# Altium PCB Brduino.PcbDoc
Units mil, origin at the board's own origin, x right, y up, seen from the top; angles counter-clockwise.
Board outline 1720 x 760 mil, 4 copper layers (Top Layer, InternalPlane1, InternalPlane2, Bottom Layer), stack 55.906 mil thick; 48 components, 77 nets, 233 pads, 114 vias.
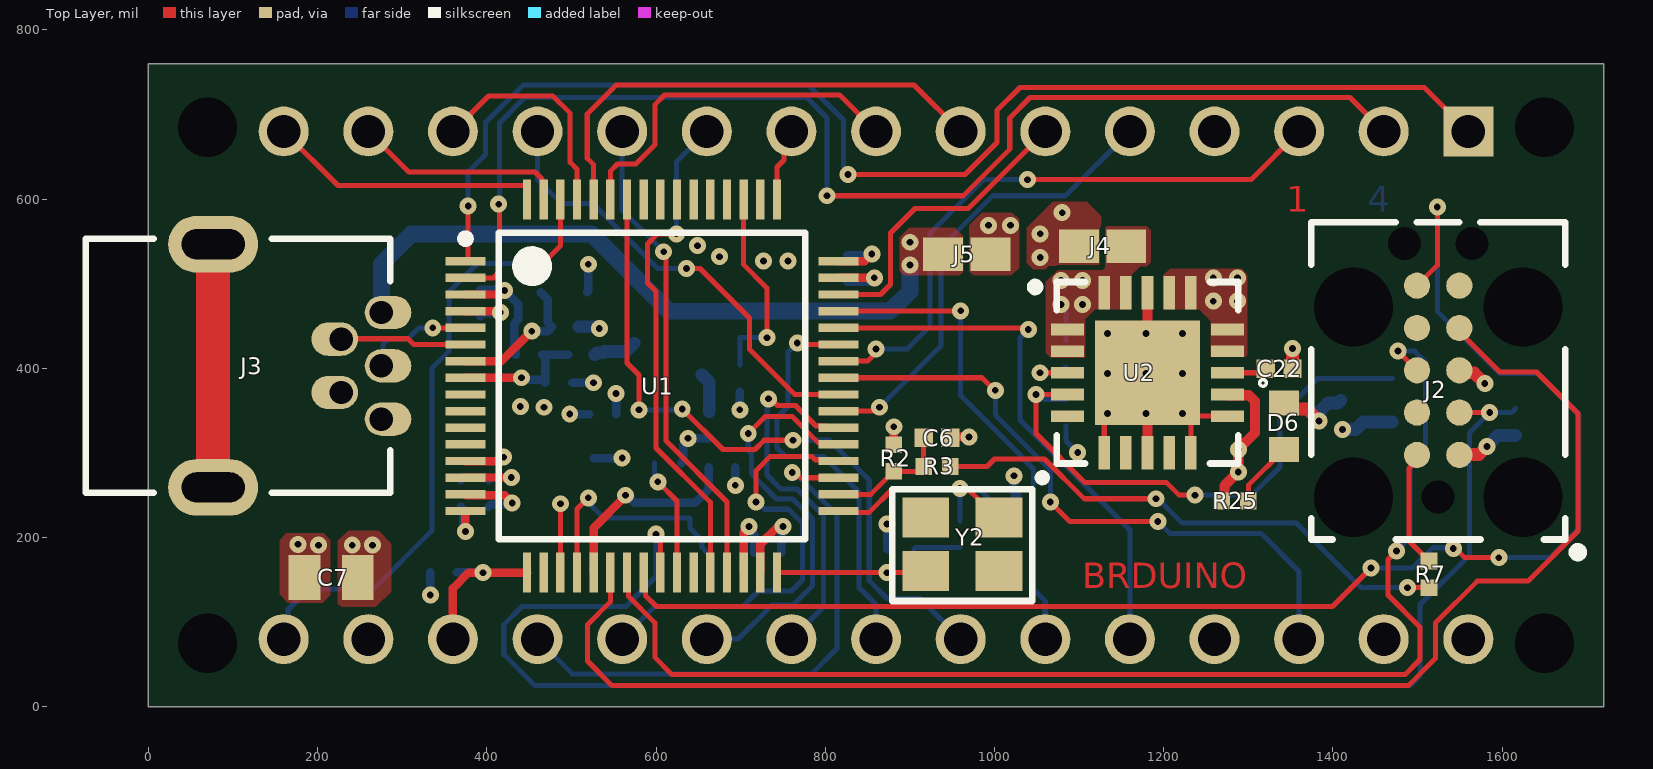
[diagram p0: Top Layer view]
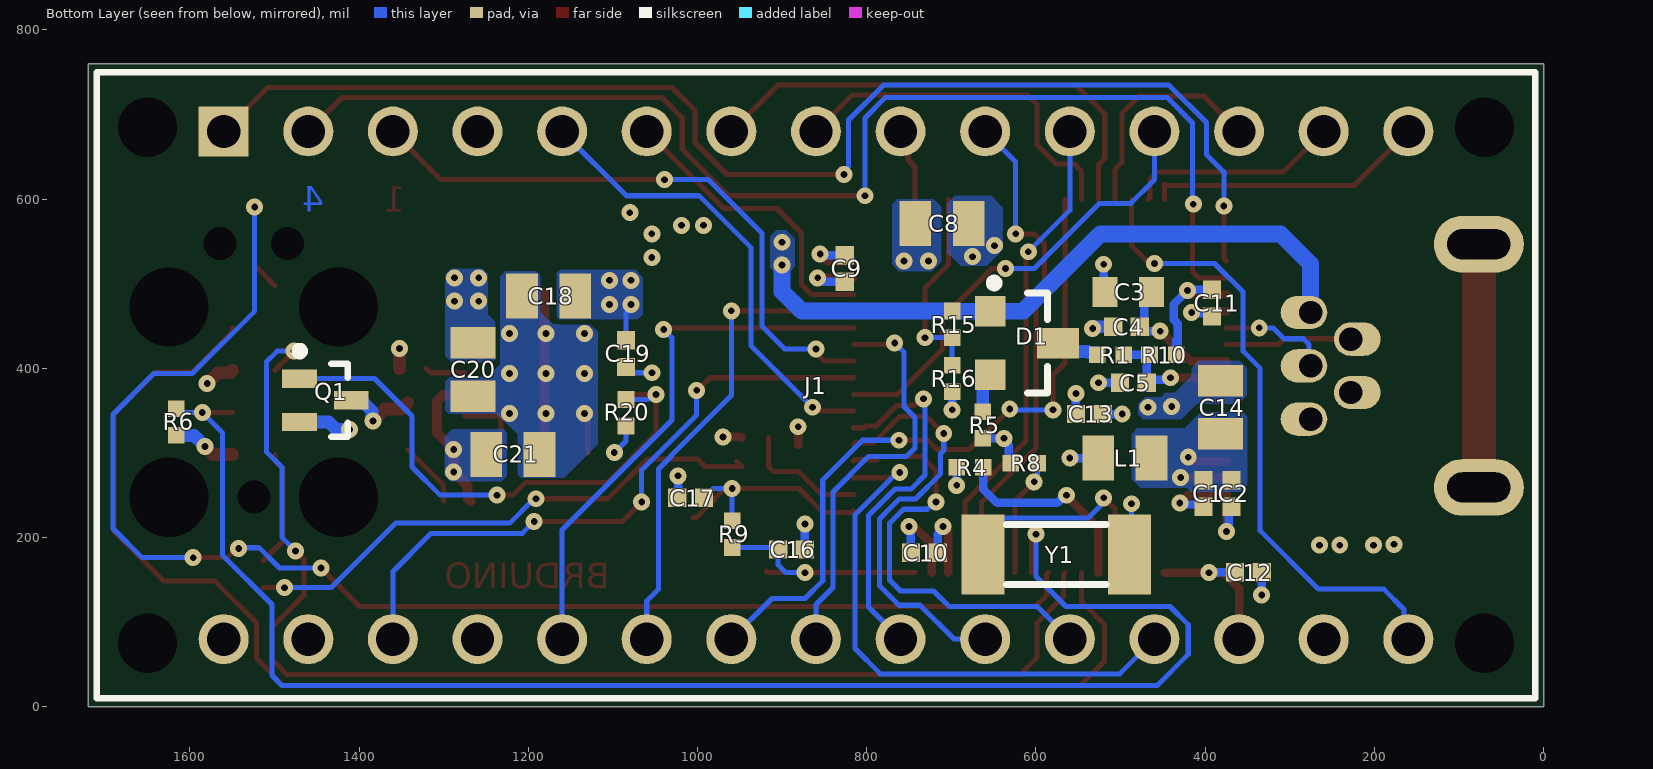
[diagram p1: Bottom Layer view, seen from below]
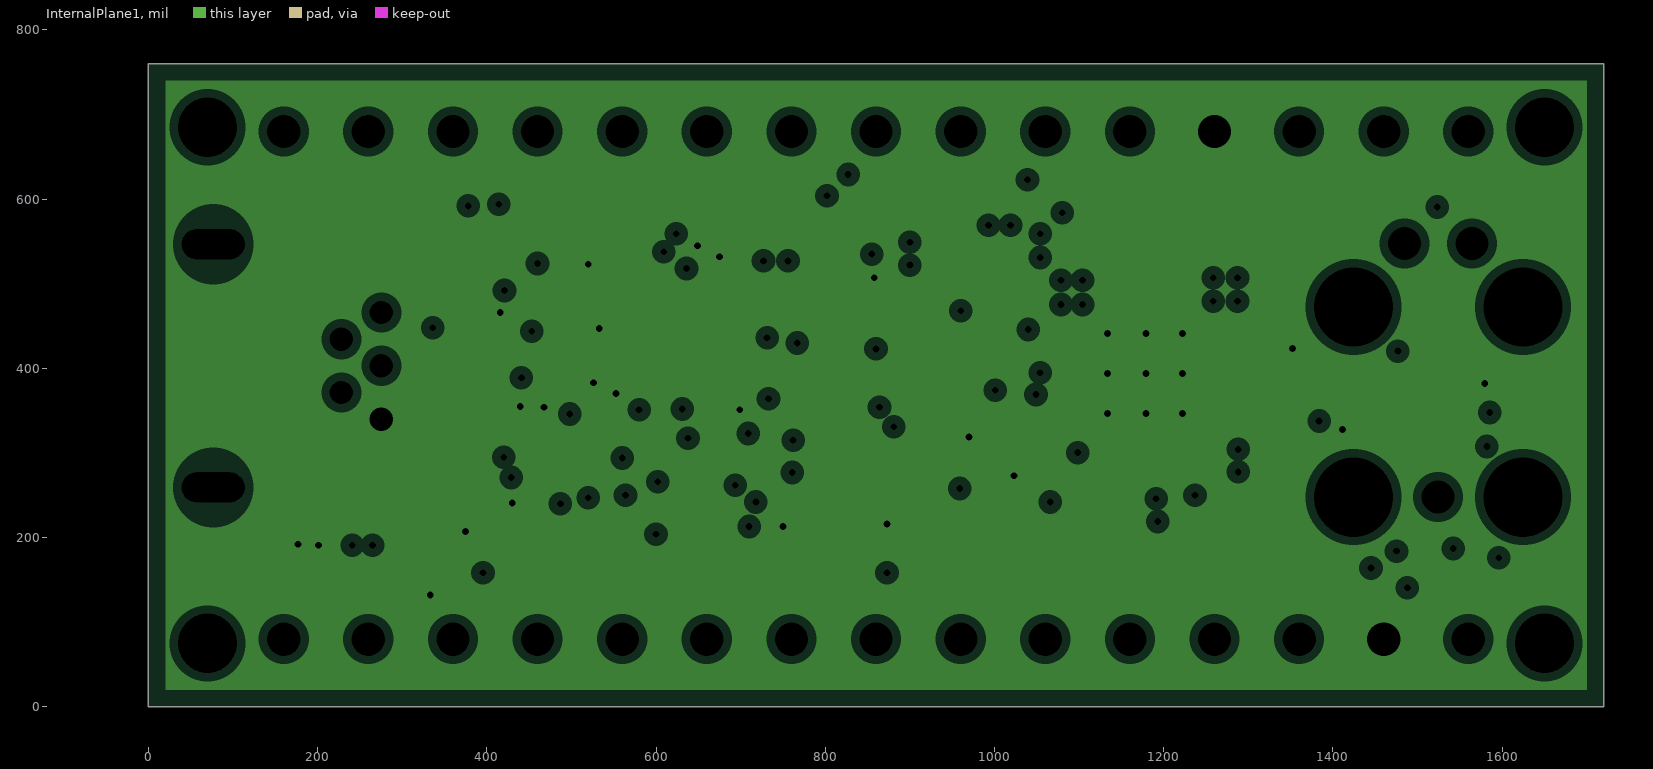
[diagram p2: InternalPlane1, clearances drawn from the general rule]
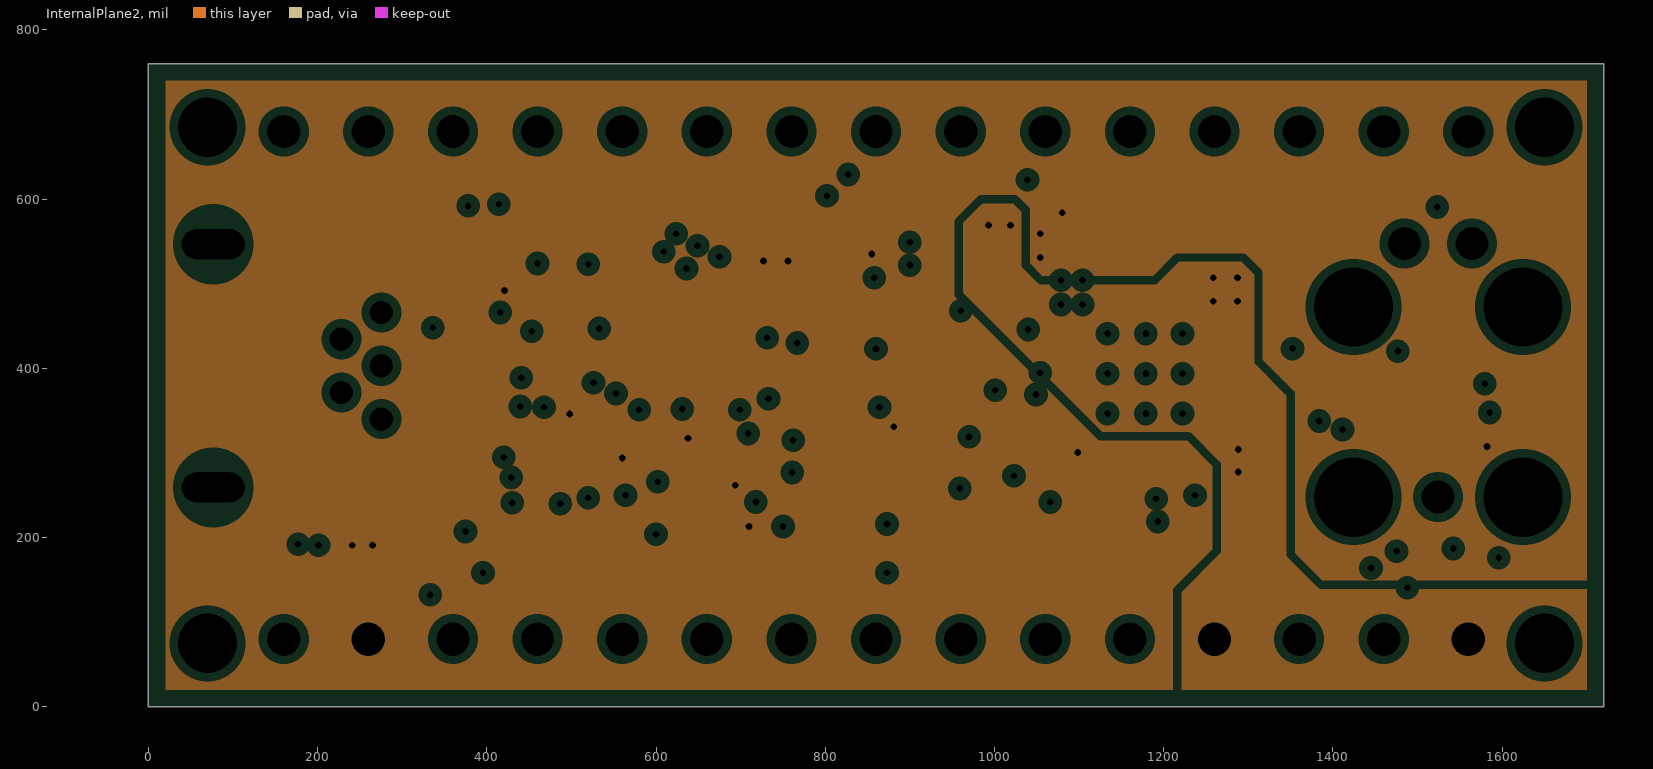
[diagram p3: InternalPlane2, clearances drawn from the general rule]

## Layer stack, top to bottom
Top Solder: solder mask 0.5, Solder Resist, Dk 3.5
Top Layer: signal copper 1.378
Dielectric1: prepreg 5.5118, FR-4, Dk 4.3
InternalPlane1: plane copper 1.378, net GND
Dielectric2: core 39.3701, FR-4, Dk 4.3
InternalPlane2: plane copper 1.378, net (Multiple Nets)
Dielectric3: prepreg 5.5118, FR-4, Dk 4.3
Bottom Layer: signal copper 1.378
Bottom Solder: solder mask 0.5, Solder Resist, Dk 3.5

## Board outline
0,0 1720,0 1720,760 0,760

## Design rules (kind name [scope] priority, off if disabled: settings)
AssemblyTestPointUsage [All] p1 off:
AssemblyTestpoint [All] p1 off: testpointundercomponent=TRUE minsize=40 maxsize=100 preferedsize=60 minholesize=0 maxholesize=40 preferedholesize=32 testpointgrid=1 usegrid=TRUE gridtolerance=0.01 allowsidetop=TRUE allowsidebottom=TRUE
Clearance Clearance-primary [InNetClass('HV-P')] p1: gap=27.56 ignorepadtopadclearanceinfootprint=FALSE
Clearance [All] p2: gap=6 ignorepadtopadclearanceinfootprint=FALSE
ComponentClearance [All] p1 off: gap=10 collisioncheckmode=3 verticalgap=10 showdistances=FALSE
DiffPairsRouting DiffPairsRouting_USB [InDifferentialPair('CPUSIGA.USB-D_1')] p1: maxlimit=10 minlimit=6 mostfreqgap=6 toplayer_minwidth=7.68 toplayer_maxwidth=15 toplayer_prefwidth=7.68 bottomlayer_minwidth=7.68 bottomlayer_maxwidth=15 bottomlayer_prefwidth=7.68 maxuncoupledlength=500
DiffPairsRouting [InDifferentialPairClass('HighSpeedDiff')] p2: maxlimit=10.08 minlimit=6.14 mostfreqgap=6.14 toplayer_minwidth=6 toplayer_maxwidth=15 toplayer_prefwidth=6 bottomlayer_minwidth=6 bottomlayer_maxwidth=15 bottomlayer_prefwidth=6 maxuncoupledlength=551.18
FabricationTestPointUsage TestPointUsage [All] p1 off: valid=0 allowmultiple=FALSE
FabricationTestpoint Testpoint [All] p1 off: side=3 testpointundercomponent=TRUE minsize=40 maxsize=100 preferedsize=60 minholesize=0 maxholesize=40 preferedholesize=32 testpointgrid=1 allowsidetop=TRUE allowsidebottom=TRUE usegrid=TRUE gridtolerance=0.01
Height [All] p1 off: minheight=0 maxheight=1000 prefheight=500
HoleSize [All] p1: absolutevalues=TRUE maxlimit=200 minlimit=7.87 maxpercent=80.000 minpercent=20.000
MatchedLengths MatchedLengthsDiff [InDifferentialPair('ETH-TX_8') or InDifferentialPair('ETH-RX_8') or InDifferentialPair('CPUSIGA.USB-D_1')] p1: tolerance=39.37 checknetsindiffpair=TRUE checkdiffpairvsdiffpair=FALSE checkxsignals=FALSE checkothers=FALSE
MatchedLengths [InxSignalClass('RMII-IF')] p2: tolerance=10 checknetsindiffpair=FALSE checkdiffpairvsdiffpair=TRUE checkxsignals=TRUE checkothers=TRUE
MinimumSolderMaskSliver [All] p1 off: minsoldermaskwidth=3.15
NetAntennae [All] p1 off: netantennaetolerance=0
PlaneClearance [All] p1: clearance=10
PlaneConnect [All] p1: planeconnectstyle=Direct reliefexpansion=20 reliefentries=4 reliefconductorwidth=10 reliefairgap=10
PolygonConnect [All] p1: connectstyle=Direct reliefconductorwidth=10 reliefentries=4 polygonreliefangle="90 Angle" airgapwidth=10
RoomDefinition U_Brduino-MCU-Main [InComponentClass('U_Brduino-MCU-Main')] p1 off: confinementstyle=ConfineIn formatcopy=TRUE lockcomponents=FALSE outline -88.62,110.61 1076.38,110.61 1076.38,605.61 -88.62,605.61
RoomDefinition U_Brduino-MCU1 [InComponentClass('U_Brduino-MCU1')] p2: confinementstyle=ConfineIn formatcopy=TRUE lockcomponents=FALSE outline 148.38,108.61 1742.38,108.61 1742.38,646.61 148.38,646.61
RoomDefinition Brduino-Main [InComponentClass('Brduino-Main')] p3: confinementstyle=ConfineIn formatcopy=TRUE lockcomponents=FALSE outline -10.98,-10.98 -10.98,770.98 1730.98,770.98 1730.98,-10.98
RoomDefinition U_Brduino-PwrLin [InComponentClass('U_Brduino-PwrLin')] p4 off: confinementstyle=ConfineIn formatcopy=TRUE lockcomponents=FALSE outline 1027.38,214.61 1507.38,214.61 1507.38,580.61 1027.38,580.61
RoutingVias [All] p1: holewidth=8 width=20 viastyle="Through Hole" minholewidth=8 minwidth=20 maxholewidth=20 maxwidth=40
SilkToSilkClearance [All] p1 off: silktosilkclearance=10
SilkToSolderMaskClearance SilkscreenOverComponentPads [IsPad] p1 off: minsilkscreentomaskgap=10 clearancetoexposedcopper=TRUE
SolderMaskExpansion [All] p1: expansion=2 istentingtop=FALSE
Width Width_HighSpeedDiff [InDifferentialPairClass('HighSpeedDiff')] p1: maxlimit=6 minlimit=6 preferedwidth=6 minimp=50.000000 maximp=50.000000 favimp=50.000000
Width Width_Fiducial [IsArc and InComponent('FID*')] p2: maxlimit=10 minlimit=3.5 preferedwidth=10
Width [All] p3: maxlimit=200 minlimit=6 preferedwidth=6
16 further rules are at their usual default settings.

## Classes and differential pairs
component class U_Brduino-PwrLin: C18 C19 C20 C21 C22 D6 J4 Q1 R20 R25 U2
component class U_Brduino-MCU-Main: C16 C17 J3 R9 R15 R16 Y2
component class U_Brduino-MCU1: C1 C2 C3 C4 C5 C6 C7 C8 C9 C10 C11 C12 C13 C14 D1 J2 L1 R1 R2 R3 R4 R5 R6 R7 R8 R10 U1 Y1
component class Brduino-Main: J1 J5
differential pair USB-D_2: +USB-D_2_P -USB-D_2_N

## Components (designator, comment, footprint, x,y, rotation, side; value= is the part's Value field where it differs from the comment)
C1 "100n" C0402 402,252 r270 bottom
C2 "100n" C0402 369,252 r270 bottom
C3 "2u2" C0603 491,490 r0 bottom
C4 "100n" C0402 493,449 r0 bottom
C5 "100n" C0402 485,383 r0 bottom
C6 "100n" C0402 932,318 r0 top
C7 "10u" C0805 216,153 r180 top
C8 "10u" C0805 711,571 r180 bottom
C9 "100n" C0402 826,518 r270 bottom
C10 "100n" C0402 732,182 r0 bottom
C11 "100n" C0402 392,477 r270 bottom
C12 "100n" C0402 349,159 r180 bottom
C13 "100n" C0402 537,346 r180 bottom
C14 "4u7" C0805 382,354 r270 bottom
C16 "22p" C0402 889,186 r180 bottom
C17 "22p" C0402 1008,247 r0 bottom
C18 "22u" C0805 1175.94,485.32 r180 bottom
C19 "10n" C0402 1084.41,417.4 r270 bottom
C20 "10u" C0805 1265.51,398.7 r90 bottom
C21 "10u" C0805 1218.27,298.31 r0 bottom
C22 "10n" C0402 1336.38,399.68 r0 top
D1 "BAT54C" SOT23 614,430 r270 bottom
D6 "LED green" LED0603 1342.28,331.77 r90 top
J1 "ARDUINO-NANO-CON" ARDUINO-NANO 860,380 r180 bottom locked
J2 "JLINK-NEEDLE" JLINK-NEEDLE 1524.37,397.72 r90 top locked
J3 "MICRO-USB" Molex-0565790519 176,403 r0 top locked
J4 "Jumper" JumperSMD 1127.72,544.37 r180 top
J5 "Jumper" JumperSMD 967,535 r180 top
L1 "600R@100MHz" L0805 495,294 r180 bottom
Q1 "PMF250XNEX" SOT323 1439.72,362.28 r180 bottom
R1 "0R" R0402 512,416 r180 bottom
R2 "4K7" R0402 881,294 r90 top
R3 "22R" R0402 932,284 r0 top
R4 "100R" R0402 678,283 r0 bottom
R5 "0R" R0402 663,333 r90 bottom
R6 "10K" R0402 1615.91,336.69 r270 bottom
R7 "33R" R0402 1513.54,156.57 r270 top
R8 "10K" R0402 614,288 r0 bottom
R9 "1M" R0402 959,204 r270 bottom
R10 "0R" R0402 450,416 r0 bottom
R15 "4K7" R0402 699,452 r90 bottom
R16 "10K" R0402 699,388 r90 bottom
R20 "4K7" R0402 1084.41,347.52 r270 bottom
R25 "3K9" R0402 1284.21,243.19 r0 top
U1 "MK22FN512VLH12" NXP-SOT1699-1 595.24,379.02 r0 top locked
U2 "TPS7A8300" S-PVQFN-N20 1180.87,394.76 r0 top
Y1 "32.768KHz" FC 576,180 r180 bottom
Y2 "24.0000MHz" "EPSON-XTAL6 3.2mm x 5mm 4pin" 962,192 r180 top locked

## Footprints (in the part's own frame and the unit in brackets; to place one, negate y for a bottom-side part, rotate by r counter-clockwise, add the part's x,y. Pads: shape width x height; smd on the part's side, far side on the other; paste and mask are expansions set on the pad)
ARDUINO-NANO [mm]
  rect 1.5x1.5 hole 1: 1(-17.78,7.62)
  round 1.5 hole 1: 2(-15.24,7.62) 3(-12.7,7.62) 4(-10.16,7.62) 5(-7.62,7.62) 6(-5.08,7.62) 7(-2.54,7.62) 8(0,7.62) 9(2.54,7.62) 10(5.08,7.62) 11(7.62,7.62) 12(10.16,7.62) 13(12.7,7.62) 14(15.24,7.62) 15(17.78,7.62) 16(17.78,-7.62) 17(15.24,-7.62) 18(12.7,-7.62) 19(10.16,-7.62) 20(7.62,-7.62) 21(5.08,-7.62) 22(2.54,-7.62) 23(0,-7.62) 24(-2.54,-7.62) 25(-5.08,-7.62) 26(-7.62,-7.62) 27(-10.16,-7.62) 28(-12.7,-7.62) 29(-15.24,-7.62) 30(-17.78,-7.62)
  round 0 hole 1.778 unplated: M1(-20.066,-7.747) M2(-20.066,7.747) M3(20.066,7.747) M4(20.066,-7.747)
  silkscreen extent -21.59,-9.4 21.59,9.4
C0402 [mm] "Chip Capacitor; Body 1.0x0.5mm (LxW typ), IPC High Density"
  rect 0.55x0.55 smd: 1(-0.4,0) 2(0.4,0)
  body extent -0.55,-0.3 0.55,0.3, height 0.6
C0603 [mm] "Chip Capacitor; Body 1.6x0.8mm (LxW typ), IPC High Density"
  rect 0.75x0.9 smd: 1(-0.7,0) 2(0.7,0)
  body extent -0.87,-0.48 0.87,0.48, height 0.85
C0805 [mm] "Chip Capacitor; Body 2.0x1.3mm (LxW typ), IPC High Density"
  rect 0.95x1.35 smd: 1(-0.8,0) 2(0.8,0)
  body extent -1.1,-0.73 1.1,0.72, height 1.1
"EPSON-XTAL6 3.2mm x 5mm 4pin" [mm]
  rect 1.4x1.2 smd: 1(-1.1,-0.8) 2(1.1,-0.8) 3(1.1,0.8) 4(-1.1,0.8)
  silkscreen extent -2.5,-2.1 2.1,1.7, body extent -1.65,-1.3 1.65,1.25, height 0.7
FC [mm]
  rect 1.3x2.4 smd: 1(-2.2,0) 2(2.2,0)
  silkscreen extent -1.5,-0.9 1.5,0.9, body extent -2.5,-0.95 2.5,0.95, height 0.9
JLINK-NEEDLE [mil]
  round 31 smd paste-31: 1(-100,-25) 2(-50,-25) 3(0,-25) 4(50,-25) 5(100,-25) 6(100,25) 7(50,25) 8(0,25) 9(-50,25) 10(-100,25)
  round 0 hole 93.5 unplated: M1(-150,100) M2(-150,-100) M3(75,100) M4(75,-100)
  round 0 hole 39 unplated: P1(-150,0) P2(150,40) P3(150,-40)
  silkscreen extent -220,-170 175,150
JumperSMD [mm] "Chip Resistor, Body 1.6x0.8mm (LxW typ), IPC High Density"
  rect 1.2x1 smd: 1(-0.711,0) 2(0.711,0)
L0805 [mm]
  rect 0.95x1.35 smd: 1(-0.8,0) 2(0.8,0)
  body extent -1.1,-0.72 1.1,0.72, height 1.1
LED0603 [mm]
  rect 0.75x0.9 smd: 1(-0.7,0) 2(0.7,0)
  silkscreen extent 1.2,0.54 1.4,0.73, body extent -0.87,-0.48 0.88,0.48, height 0.85
Molex-0565790519 [mm]
  oval 1.4x1 hole 0.7 copper offset 0.2,0: 1(2.525,1.6) 3(2.525,0) 5(2.525,-1.6)
  oval 1.4x1 hole 0.7 copper offset -0.2,0: 2(1.325,0.8) 4(1.325,-0.8)
  oval 2.7x1.7 hole 0.9 slot 1.9 at 0 deg: M1(-2.525,-3.65) M2(-2.525,3.65)
  silkscreen extent -6.35,-3.81 2.79,3.81, body extent -6.27,-3.85 2.73,3.85, height 3.95
NXP-SOT1699-1 [mm] "TSQFP, 64-Leads, Body 10.00x10.00mm, Pitch 0.50mm, IPC High Density"
  rect 1.2x0.25 smd: 1(-5.6,3.75) 2(-5.6,3.25) 3(-5.6,2.75) 4(-5.6,2.25) 5(-5.6,1.75) 6(-5.6,1.25) 7(-5.6,0.75) 8(-5.6,0.25) 9(-5.6,-0.25) 10(-5.6,-0.75) 11(-5.6,-1.25) 12(-5.6,-1.75) 13(-5.6,-2.25) 14(-5.6,-2.75) 15(-5.6,-3.25) 16(-5.6,-3.75) 33(5.6,-3.75) 34(5.6,-3.25) 35(5.6,-2.75) 36(5.6,-2.25) 37(5.6,-1.75) 38(5.6,-1.25) 39(5.6,-0.75) 40(5.6,-0.25) 41(5.6,0.25) 42(5.6,0.75) 43(5.6,1.25) 44(5.6,1.75) 45(5.6,2.25) 46(5.6,2.75) 47(5.6,3.25) 48(5.6,3.75)
  rect 0.25x1.2 smd: 17(-3.75,-5.6) 18(-3.25,-5.6) 19(-2.75,-5.6) 20(-2.25,-5.6) 21(-1.75,-5.6) 22(-1.25,-5.6) 23(-0.75,-5.6) 24(-0.25,-5.6) 25(0.25,-5.6) 26(0.75,-5.6) 27(1.25,-5.6) 28(1.75,-5.6) 29(2.25,-5.6) 30(2.75,-5.6) 31(3.25,-5.6) 32(3.75,-5.6) 49(3.75,5.6) 50(3.25,5.6) 51(2.75,5.6) 52(2.25,5.6) 53(1.75,5.6) 54(1.25,5.6) 55(0.75,5.6) 56(0.25,5.6) 57(-0.25,5.6) 58(-0.75,5.6) 59(-1.25,5.6) 60(-1.75,5.6) 61(-2.25,5.6) 62(-2.75,5.6) 63(-3.25,5.6) 64(-3.75,5.6)
  silkscreen extent -5.72,-4.6 4.6,4.6, body extent -5,-5 5,5, height 1.6
R0402 [mm] "Chip Resistor, Body 1.1x0.5mm (LxW typ), IPC High Density"
  rect 0.5x0.5 smd: 1(-0.4,0) 2(0.4,0)
  body extent -0.55,-0.3 0.55,0.3, height 0.4
S-PVQFN-N20 [mm] "(RGW) QFN 5mmx5mm, RM 0.65mm"
  rect 1x0.35 smd: 1(-2.4,1.3) 2(-2.4,0.65) 3(-2.4,0) 4(-2.4,-0.65) 5(-2.4,-1.3) 11(2.4,-1.3) 12(2.4,-0.65) 13(2.4,0) 14(2.4,0.65) 15(2.4,1.3)
  rect 0.35x1 smd: 6(-1.3,-2.4) 7(-0.65,-2.4) 8(0,-2.4) 9(0.65,-2.4) 10(1.3,-2.4) 16(1.3,2.4) 17(0.65,2.4) 18(0,2.4) 19(-0.65,2.4) 20(-1.3,2.4)
  rect 3.15x3.15 smd: 21(0,0)
  silkscreen extent -3.5,-2.73 2.73,2.73, body extent -2.58,-2.57 2.57,2.58, height 1
SOT23 [mil]
  rect 36x36 smd: 1(-37.5,-40) 2(37.5,-40)
  rect 36x50 smd: 3(0.5,40)
  silkscreen extent -76,-40 59,28, body extent -59,-28 59,28, height 43
SOT323 [mm]
  rect 1.05x0.55 smd: 1(-0.775,0.65) 2(-0.775,-0.65) 3(0.775,0)
  silkscreen extent -0.9,-1.1 0.67,1.6, body extent -0.67,-1.1 0.67,1.1, height 1.1

## Part data
C1 C2 C3 C4 C5 C6 C7 C8 C9 C10 C11 C12 C13 C14 C16 C17: library part CAP, POPULATED=yes
  C1 C2 C4 C5 C6 C9 C10 C11 C12 C13: Parameters="X7R, 25V, 10%"
  C3: Parameters="X5R, 10V, 10%"
  C7 C8 C14: Parameters="X7R, 10V, 10%"
  C16 C17: Parameters="C0G, 16V, 5%"
C18: library part CAP, MFR=MURATA, MFR-PN=GRM21BR61A226ME44#, Parameters="X5R, 10V, 10%", POPULATED=yes
C19 C22: library part CAP, MFR=MURATA, MFR-PN=GRM155R71H103KA88#, Parameters="X7R, 50V, 10%", POPULATED=yes
C20 C21: library part CAP, MFR=MURATA, MFR-PN=GRM21BR61E106KA73#, Parameters="X5R, 25V, 10%", POPULATED=yes
D1: library part DUALSDIODE-CC, MFR=ONSEMI, MFR-PN=BAT54C, POPULATED=yes
D6: library part LED, MFR=KINGBRIGHT, MFR-PN=APHD1608LCGCK, Parameters="If >= 2mA", POPULATED=yes
J3: MFR=GCT, MFR-PN=USB3080, POPULATED=yes
L1: library part FERRITE, "Ferrite Bead", MFR=WUERTH, MFR-PN=742792040, Parameters="Idc=2A, Rdc=0.15R", POPULATED=yes
Q1: library part MOSFET-N-D, "N-Channel MOSFET", MFR=NEXPERIA, MFR-PN=PMF250XNEX, POPULATED=yes
R1 R2 R3 R4 R5 R6 R7 R8 R9 R10 R15 R16 R20 R25: library part RES1A, Parameters="1/16W, 50V, 1%", POPULATED=yes
U1: MFR-PN=NXP, MFR=MK22FN512VLH12, POPULATED=yes
U2: MFR=TI, MFR-PN=TPS7A8300RGWT, POPULATED=yes
Y1: library part CRYSTAL2, MFR=EUROQUARTZ, MFR-PN=PH32768S, POPULATED=yes
Y2: library part CRYSTAL-5X3.2, MFR=EPSON, MFR-PN="FA-238 24.0000MB-C", Parameters="-20°C/+70°C, 50ppm, 18pF, 60ohms", POPULATED=yes
J1 J2 J4 J5: POPULATED=yes

## Via types
v1: diameter 20, hole 8, Top Layer to Bottom Layer, 114 vias

## Nets (pads, with @x,y where several pads share a name; then routed paths per layer and width w, separated by ;. In a path a pad name is that pad's centre, name@x,y a point inside that pad or via, vN(x,y) a via of type N, cw(c..) or ccw(c..) an arc to the next point about the centre after c; other vN are vias at no path point)
3V3: C7.1 C8.1 C9.1 C10.1 C11.1 C13.2 J1.17 J2.1 J4.2 L1.1 R2.2 R4.2 R5.1 R6.2 R8.2 R10.1 R20.2 U1.3 U1.30 U1.48 | length 618.1
  Top Layer w6: v1(1098.34,300.42) 1098.34,300.13 v1@1099.17,299.29
  Top Layer w10: U1.3 416.28,487.28 v1(421,492) ; U1.30 703.5,206.5 v1(710,213) ; U1.48 846.65,526.65 v1(855,535) ; R2.2 v1(881,331)
  Top Layer w15: J2.1 1549.92,298.27 1572.56,298.27 v1(1581.93,307.64)
  Bottom Layer w6: R20.2 1084.41,314.06 1098.04,300.42 v1(1098.34,300.42)
  Bottom Layer w10: C11.1 420.25,492.75 v1(421,492) 437,476 437,457.45 434.78,455.22 434.85,455.15 432.17,452.47 432.17,435.21 ; v1(498,346) C13.2 ; L1.1 v1(560,294) ; R8.2 632.25,290.5 632.25,309.05 637.75,314.55 v1(637.75,317.25) R5.1 ; v1(693.75,261.75) R4.2 ; v1(710,213) 710,210.29 716.25,204.04 C10.1 ; C9.1 853.75,533.75 v1(855,535) ; 432.17,435.21 432.17,418.09 R10.1 434.25,433.13 432.17,435.21
  Bottom Layer w15: v1(1581.93,307.64) 1594.82,320.53 1615.49,320.53 R6.2
  other v1: 241,191 265,191 727,527 756,527 1054,531 1054,559 1080,584
5V: C20.2 C21.2 J1.27 J1.30 J5.1 R25.1 U2.12 U2.14 U2.15 U2.16 U2.17 | length 170.1
  Top Layer w12: R25.1 1271.65,246.38 1271.65,261.14 v1(1288.15,277.64) v1(1288.15,304.21) 1307.83,323.9 1307.83,361.25 1300.81,368.28 1276.24,368.28 U2.12
  other v1: 1258.62,479.41 1287.17,479.41 1258.62,506.97 1287.17,506.97 993,569 1019,569
ADC0_DM0_1: U1.10
ADC0_DP0_1: U1.9
ADC1_DM0_1: U1.12
ADC1_DP0_1: U1.11
CHASSIS: J3.M1 J3.M2 | length 287.4
  Top Layer w40: J3.M1 J3.M2
DAC0_1: U1.18
EXTAL0_2: C16.1 R9.2 U1.32 Y2.3 | length 285.6
  Top Layer w6: U1.32 v1(873,158.54) 916.73,158.54 Y2.3
  Bottom Layer w6: v1(873,158.54) 895.54,158.54 904.75,167.75 C16.1 907,188.25 R9.2
GND: C1.2 C2.2 C3.2 C4.2 C5.2 C6.2 C7.2 C8.2 C9.2 C10.2 C11.2 C12.2 C13.1 C14.1 C16.2 C17.2 C18.1 C20.1 C21.1 C22.2 J1.4 J1.29 J2.3 J3.5 Q1.2 R16.1 U1.4 U1.15 U1.16 U1.31 U1.47 U2.6 U2.8 U2.10 U2.11 U2.18 U2.21 | length 1071.6
  Top Layer w6: U2.6 U2.21@1129.68,343.58 ; U2.10 1232.05,343.58 U2.11
  Top Layer w10: v1(374.76,207.24) U1.16 ; U1.15 375.83,250 421,250 v1(430,241) ; U1.4 416.21,467.6 416,467.39 v1(416,466) ; U1.31 723.19,192.19 744,213 v1(750,213) ; U1.47 v1(857.97,506.97) ; C6.2 948.75,319 v1(970,319)
  Top Layer w12: U2.8 U2.21 U2.18
  Top Layer w15: C22.2 v1(1352.13,423.31) ; J2.3 1552.43,394.66 1566.8,394.66 v1(1579.49,381.97)
  Bottom Layer w10: v1(333.25,132.25) C12.2 ; C2.2 372.34,232.91 372.34,212.36 374.76,209.94 v1(374.76,207.24) ; C11.2 395.83,465.08 416,465.08 v1(416,466) ; C1.2 404.83,239.09 428.09,239.09 v1(430,241) ; C5.2 v1(526,383) ; C3.2 520,491.44 v1(520,523) ; C13.1 v1(552.75,370.25) ; v1(699,351) R16.1 ; C10.2 747.75,208.04 750,210.29 v1(750,213) ; C9.2 850.55,502.25 855.26,506.97 v1(857.97,506.97) ; v1(873,216) 873,212 873.25,211.75 C16.2 ; v1(1023,273) 1023,254.25 1027,250.25 C17.2
  Bottom Layer w15: C4.2 531,449 v1(533,447) ; v1(1411.18,327.83) 1426.93,327.83 1435.79,336.69 Q1.2
  other v1: 201,191 177,192 1133.62,346.54 1178.9,346.54 1222.2,346.54 467.65,354 439.65,355 1133.62,393.78 1178.9,393.78 1222.2,393.78 1133.62,441.02 1178.9,441.02 1222.2,441.02 675,532 649,545
NetC3_1: C3.1 C4.1 U1.7 | length 166
  Top Layer w10: U1.7 417.32,408.54 452.69,443.91 v1(453.17,443.91)
  Bottom Layer w10: v1(453.17,443.91) 472.17,443.91 C4.1 472,454.25 472,481.44 C3.1
NetC6_1: C6.1 R2.1 R3.1 U1.34 | length 148.2
  Top Layer w6: U1.34 853.81,251.06 R2.1 910.5,278.25 R3.1 C6.1
NetC19_2: C19.2 U2.3 | length 65.8
  Top Layer w6: v1(1053.9,394.76) U2.3
  Bottom Layer w6: v1(1053.9,394.76) 1077.52,394.76 C19.2
NetC22_1: C22.1 U2.13 | length 47.3
  Top Layer w6: U2.13 1315.71,394.76 C22.1
NetD1_2: D1.2 R5.2 | length 47.5
  Bottom Layer w15: D1.2 663,383.5 R5.2
NetD1_3: D1.3 R1.1 | length 51.8
  Bottom Layer w15: R1.1 530.09,418.34 537.42,418.34 538.88,419.8 564.3,419.8 D1.3
NetD6_1: D6.1 R25.2 | length 78.6
  Top Layer w6: R25.2 1299.96,261.89 D6.1
NetD6_2: D6.2 Q1.3 | length 92.4
  Top Layer w15: D6.2 1349.55,352.07 1369.23,352.07 v1(1383.62,337.68)
  Bottom Layer w15: v1(1383.62,337.68) 1384.58,338.63 1384.58,349.46 1394.07,358.96 1405.89,358.96 Q1.3
NetJ2_5: J2.5
NetJ2_7: J2.7
NetJ2_9: J2.9
NetJ2_10: J2.10 R7.1 | length 139.1
  Top Layer w6: J2.10 1499.37,291.15 1489.92,281.7 1489.92,195.94 R7.1
NetJ3_4: J3.4
NetU1_19: U1.19 Y1.2 | length 143
  Top Layer w6: U1.19 v1(486.97,239.97)
  Bottom Layer w6: Y1.2@486.97,178.42 v1(486.97,239.97)
NetU1_20: U1.20 Y1.1 | length 283.7
  Top Layer w6: U1.20 506.65,233.65 v1(520,247)
  Bottom Layer w6: v1(520,247) 520,243.21 524.5,238.71 524.5,236.63 538.13,223 640.02,223 640.02,211.08 654,197.1 654,188.61 Y1.1 Y1.1@662.61,176
NetU2_5: U2.5
NetU2_7: U2.7
NetU2_9: U2.9
nRESET_1: R3.2 R7.2 | length 641
  Top Layer w6: R3.2@953.75,290 R3.2 991,284 1000,293 1059,293 1106.16,245.84 v1(1191,245.84) ; v1(1487.96,140.82) R7.2
  Bottom Layer w6: v1(1191,245.84) 1193.16,245.84 1222,217 1357,217 1433.18,140.82 v1(1487.96,140.82)
PGOOD1_1: Q1.1 R20.1 U2.4 | length 653.1
  Top Layer w6: U2.4 1049.17,369.17 v1(1049,369) 1049,322.89 1107.05,264.84 1203.5,264.84 1218.27,250.08 v1(1236.97,250.08)
  Bottom Layer w6: 1058.52,363.27 R20.1 ; v1(1236.97,250.08) 1303.9,250.08 1337.36,283.54 1337.36,343.58 1381.65,387.87 Q1.1
PTA0_3: J2.4 U1.22 | length 1722.2
  Top Layer w6: U1.22 546.02,124.02 519,97 519,54 548,25 1489,25 1521,57 1521,99 1570.5,148.5 1630.47,148.5 1689.72,207.76 1689.72,346.54 1640.51,395.75 1597.2,395.75 1549.37,443.58 J2.4
PTA1_3: J2.8 U1.23 | length 1490.1
  Top Layer w6: U1.23 567.63,156.62 567.63,130.37 598.53,99.47 598.53,58.47 619,38 1485.03,38 1503,55.97 1503,94 1465,132 1465,174 v1(1475,184) ; v1(1476.73,420.35) J2.8
  Bottom Layer w6: v1(1475,184) 1490.91,199.91 1490.91,282.69 1509.61,301.39 1509.61,407.56 1496.81,420.35 v1(1476.73,420.35)
PTA2_3: J2.6 U1.24 | length 1763
  Top Layer w6: U1.24 587.31,156.62 587.31,131.68 600.47,118.53 1399.53,118.53 v1(1445,164) ; J2.6 1523.39,521.73 v1(1523.39,590.63) ; v1(1542.24,187.11) 1544.89,187.11 1555.74,176.26 v1(1596,176.26)
  Bottom Layer w6: v1(1445,164) 1494,164 1518,188 1541.35,188 v1(1542.24,187.11) ; v1(1523.39,590.63) 1523.39,467.6 1597.2,393.78 1642.48,393.78 1690.71,345.55 1690.71,210.71 1656.26,176.26 v1(1596,176.26)
PTA3_3: J2.2 R6.1 U1.25 | length 1852.7
  Top Layer w6: v1(600,204) 605.08,198.92 U1.25 ; J2.2 v1(1585.2,347.72)
  Bottom Layer w6: v1(600,204) 600,154 564.53,118.53 441.53,118.53 420,97 420,62 457,25 1491,25 1503,37 1503,121 1561.24,179.24 1561.24,323.76 v1(1585.2,347.72) 1611.18,347.72 R6.1
PTA4_3: R8.1 U1.26 | length 140.4
  Top Layer w6: v1(602.13,265.87) 624.76,243.24 U1.26
  Bottom Layer w6: R8.1 598.25,269.75 v1(602.13,265.87)
PTA5_1: U1.27
PTA12_1: J1.10 U1.28 | length 594
  Top Layer w6: v1(624,559) 602,559 590,547 590,501 600,491 600,306 664.13,241.87 U1.28
  Bottom Layer w6: v1(624,559) 624,644 J1.10
PTA13_1: J1.11 U1.29 | length 572.7
  Top Layer w6: v1(609,537.76) 612,534.76 612,314 683.82,242.18 U1.29
  Bottom Layer w6: J1.11 560,586.76 v1(609,537.76)
PTA19_2: C17.1 R9.1 U1.33 Y2.1 | length 293.2
  Top Layer w6: U1.33 817.63,229.46 851.46,229.46 880,258 v1(959,258) 968,258 980.75,245.25 980.75,244.12 1001.37,223.5 Y2.1
  Bottom Layer w6: R9.1 v1(959,258) 981.25,258 C17.1
PTB0_1: J1.19 U1.35 | length 672.4
  Top Layer w6: v1(761,277) 764.79,277 771.04,270.75 U1.35
  Bottom Layer w6: J1.19 501,39 784,39 814,69 814,226.94 763.94,277 v1(761,277)
PTB1_1: J1.20 U1.36 | length 518.4
  Top Layer w6: v1(718,242) 718,279 735,296 784,296 788,292 814.14,292 U1.36
  Bottom Layer w6: J1.20 598.53,118.53 702.53,118.53 721,137 760,137 773,150 773,217 756.5,233.5 728.51,233.5 720.01,242 v1(718,242)
PTB2_1: J1.21 U1.37 | length 502.3
  Top Layer w6: v1(709,323) 729,343 760.87,343 791.83,312.04 813.79,312.04 U1.37
  Bottom Layer w6: J1.21 697,80 737,120 762,120 785,143 785,222 771,236 761.47,245.5 742.5,245.5 712.59,275.41 712.59,299.41 709,303 v1(709,323)
PTB3_1: J1.22 U1.38 | length 436.3
  Top Layer w6: v1(733,364) 735.51,364 743.51,356 764.84,356 789.12,331.72 801.45,331.72 803.37,329.8 U1.38
  Bottom Layer w6: v1(733,364) 731,362 731,273.97 747.47,257.5 766.47,257.5 798,225.97 798,118 J1.22
PTB16_1: J1.5 U1.39 | length 578.3
  Top Layer w6: 844.73,349.73 815.95,349.73 U1.39 859.49,349.49 v1(864,354)
  Bottom Layer w6: v1(864,354) 937,427 937,543 998,604 1084,604 J1.5
PTB17_1: J1.12 U1.40 | length 539.6
  Top Layer w6: v1(636,518) 652,518 710.5,459.5 710.5,422.5 763.83,369.17 U1.40
  Bottom Layer w6: J1.12 460,623 488,595 525,595 590,530 590,529.89 601.89,518 v1(636,518)
PTB18_1: J1.28 U1.41 | length 762.4
  Top Layer w6: U1.41 985.14,388.86 v1@1000.5,373.5 ; v1(1001,374) v1@1004.07,370.93 ; v1(1066,242) 1089,219 v1(1193,219)
  Bottom Layer w6: v1(1001,374) 1001,345 1066,280 v1(1066,242) ; v1(1193,219) 1207,205 1315,205 1360,160 J1.28
PTB19_1: J1.3 U1.42 | length 716.4
  Top Layer w6: U1.42 850.13,408.54 v1@858,416.42 ; v1(1039.11,623) 1303,623 J1.3
  Bottom Layer w6: v1(860,423) 897,423 924,450 924,560 987,623 v1(1039.11,623)
PTC0_1: J1.23 U1.43 | length 484.2
  Top Layer w6: v1(767,430) 768.77,428.23 U1.43
  Bottom Layer w6: v1(767,430) 756,419 756,355 743,342 743,306 753,296 798,296 840,254 840,141 860,121 J1.23
PTC1_1: J1.26 U1.44 | length 649.1
  Top Layer w6: U1.44 1038.09,447.91 v1(1040,446)
  Bottom Layer w6: v1(1040,446) 1030,436 1030,339 1160,209 J1.26
PTC2_1: J1.25 U1.45 | length 575.1
  Top Layer w6: U1.45 v1@960,467.6
  Bottom Layer w6: v1(960,468) 960,368 1030,298 ; 1031,297 1030,298 ; J1.25 1060,125 1046,139 1046,281 1030,297 1030,298
PTC3_1: J1.6 U1.46 | length 359.8
  Top Layer w6: U1.46 865.15,487.28 877,499.13 877,560 906,589 969,589 J1.6
PTC4_1: J1.9 U1.49 | length 87.6
  Top Layer w6: U1.49 742.87,637.87 751.26,646.26 751.26,671.26 J1.9
PTC5_1: U1.50
PTC6_2: R15.1 R16.2 U1.51 | length 239.5
  Top Layer w6: U1.51 703.5,522.5 731.25,494.75 v1(731.25,436.25)
  Bottom Layer w6: R16.2 R15.1 v1(731.25,436.25)
PTC7_1: U1.52
PTC8_1: U1.53
PTC9_1: U1.54
PTC10_1: U1.55
PTC11_1: U1.56
PTD0_1: U1.57
PTD1_1: J1.24 U1.58 | length 826.3
  Top Layer w6: U1.58 565.71,406.29 580,392 v1(580,351) ; v1(631,352) 679,304 716.87,304 727.87,315 v1(762,315)
  Bottom Layer w6: v1(580,351) 629,351 630,352 v1(631,352) ; v1(762,315) 805,315 852,268 852,149 873,128 912,128 J1.24
PTD2_1: J1.8 U1.59 | length 430.4
  Top Layer w6: U1.59 546.02,633.02 554.47,641.47 575.96,641.47 598.53,664.04 598.53,711.53 610,723 817,723 J1.8
PTD3_1: J1.7 U1.60 | length 582.7
  Top Layer w6: U1.60 526.34,640.66 518.67,648.33 518.67,700.67 553,735 905,735 J1.7
PTD4_1: J1.13 U1.61 | length 269.8
  Top Layer w6: J1.13 402,722 478,722 498.53,701.47 498.53,643.47 506.65,635.35 U1.61
PTD5_1: J1.16 U1.62 | length 745.2
  Top Layer w6: v1(460,524) 465.97,524 486.97,545 U1.62
  Bottom Layer w6: J1.16 165.01,85.01 165.01,115.01 189,139 266,139 335,208 335,400 355.09,420.09 355.09,490.22 388.87,524 v1(460,524)
PTD6_1: J1.14 U1.63 | length 253.7
  Top Layer w6: J1.14 307.89,632.11 456.89,632.11 465.36,623.64 465.36,601.41 U1.63
PTD7_1: J1.15 U1.64 | length 334
  Top Layer w6: J1.15 224,616 446,616 448,618 448,599.89 U1.64
PTE0_1: J1.1 U1.1 | length 1519.6
  Top Layer w6: U1.1 375.08,526.65 378,529.57 v1(378,592) ; v1(827,629) 965,629 1003,667 1003,705 1030,732 1508,732 J1.1
  Bottom Layer w6: v1(378,592) 378,630 377,631 398.53,652.53 398.53,690.53 443,735 780,735 821.47,693.53 821.47,638.32 827,632.79 v1(827,629)
PTE1_1: J1.2 U1.2 | length 1465.2
  Top Layer w6: U1.2 408,507 415,514 415,593 v1(414,594) ; v1(802,604) 963,604 1018,659 1018,696 1042,720 1420,720 J1.2
  Bottom Layer w6: v1@415,594 415,690.03 444.97,720 778,720 802,696 v1(802,604)
PW-Lin1_4: C18.2 C19.1 J4.1 U2.1 U2.2 U2.19 U2.20 | length 44.8
  Bottom Layer w6: v1(1078.5,475.47) 1078.5,471.68 1084.41,465.78 C19.1
  other v1: 1104.09,475.47 1078.5,504.02 1104.09,504.02
USB-D_2_N: J3.2 U1.6 | length 149.6
  Top Layer w6: J3.2 228.67,435 307,435 313.77,428.23 U1.6
USB-D_2_P: J3.3 U1.5 | length 136.4
  Top Layer w6: J3.3 J3.3@275.41,407.78 ; v1(336.09,447.91) U1.5
  Bottom Layer w6: J3.3 277.17,404.76 277.17,428.17 284,435 307,435 319.91,447.91 v1(336.09,447.91)
V-USB_1: D1.1 J3.1 J5.2 R15.2 | length 775.7
  Bottom Layer w10: R15.2@697.75,467.75 R15.2
  Bottom Layer w20: J3.1 275.41,523.41 311,559 524,559 615.5,467.5 D1.1 697.5,467.5 697.75,467.75 R15.2@698,468 ; R15.2 876.75,467.75 900,491 v1(900,522)
  other v1: 900,549
VBAT_M_3: R4.1 U1.21 | length 241.2
  Top Layer w10: U1.21 526.34,211.34 564,249 v1(564,250)
  Bottom Layer w10: v1(564,250) 565.86,250 574.86,241 646,241 662,257 ; 662.25,257.25 R4.1
VDDA_3: C1.1 C2.1 C14.2 L1.2 U1.13 U1.14 | length 111.8
  Top Layer w10: U1.14 375.02,271 v1(429,271) ; U1.13 415.43,290.43 v1(420,295)
  Bottom Layer w10: C2.1 C2.1@373.31,272.06 ; C1.1 C1.1@405,270.75
VREF_1: C12.1 J1.18 U1.17 | length 186.3
  Top Layer w10: J1.18 360,140 378.54,158.54 v1(395.54,158.54) U1.17
  Bottom Layer w10: C12.1 395.09,159 v1(395.54,158.54)
Vregin_3: C5.1 R1.2 R10.2 U1.8 | length 161.9
  Top Layer w10: U1.8 v1(440.86,388.86)
  Bottom Layer w10: v1(440.86,388.86) 443.56,388.86 445.72,386.7 465.55,386.7 C5.1 469.25,412.5 R10.2 R1.2
pads on no net: J1.M1 J1.M2 J1.M3 J1.M4 J2.M1 J2.M2 J2.M3 J2.M4 J2.P1 J2.P2 J2.P3 Y2.2 Y2.4

## Polygon pours and split planes (outlines as drawn)
VDDA_3 on Bottom Layer "C_P3V3_L03_P-001" (solid, remove dead copper, pour order 6): 350,343 350,261 357,254 417,254 422,259 477,259 487,269 487,322 480,329 424,329 405,348 355,348
GND on Bottom Layer "C_P3V3_L03_P-001" (solid, remove dead copper, pour order 7): 351,368 361,358 410,358 428,340 473,340 479,346 479,358 471,366 452,366 447,371 436,371 416,391 416,400 407,409 359,409 351,401
3V3 on Bottom Layer "C_P3V3_L03_P-001" (solid, remove dead copper, pour order 8): 712,526 723,515 762,515 770,523 770,594 764,600 721,600 712,591
GND on Bottom Layer "C_P3V3_L03_P-001" (solid, remove dead copper, pour order 9): 639,540 658,521 689,521 705,537 705,595 696,604 653,604 639,590
V-USB_1 on Bottom Layer "C_P3V3_L03_P-001" (solid, remove dead copper, pour order 14): 885,520 894,511 906,511 914,519 914,556 907,563 895,563 885,553
5V on Bottom Layer "C_P3V3_L03_P-001" (solid, remove dead copper, pour order 3): 1247.8,463.66 1238.94,454.8 1238.94,410.51 1242.87,406.57 1290.12,406.57 1297.99,414.45 1297.99,510.91 1291.1,517.8 1253.7,517.8 1247.8,511.89
GND on Bottom Layer "C_P3V3_L03_P-001" (solid, remove dead copper, pour order 2): 1185.79,466.61 1171.02,451.85 1126.73,451.85 1117.87,442.99 1117.87,310.12 1157.24,270.75 1208.43,270.75 1212.36,274.69 1212.36,321.93 1236.97,346.54 1294.06,346.54 1297.99,350.47 1297.99,383.94 1292.09,389.84 1247.8,389.84 1233.03,404.61 1233.03,508.94 1227.13,514.84 1190.71,514.84 1185.79,509.92
PW-Lin1_4 on Bottom Layer "C_P3V3_L03_P-001" (solid, remove dead copper, pour order 1): 1064.72,463.66 1070.63,457.76 1163.15,457.76 1166.1,460.71 1166.1,512.87 1162.17,516.81 1073.58,516.81 1064.72,507.95
5V on Bottom Layer "C_P3V3_L03_P-001" (solid, remove dead copper, pour order 0): 1225.16,272.72 1231.06,266.81 1292.09,266.81 1298.98,273.7 1298.98,318.98 1290.12,327.83 1229.09,327.83 1225.16,323.9
3V3 on Top Layer "C_P3V3_L03_P-001" (solid, remove dead copper, pour order 11): 224,122 228,118 269,118 287,136 287,193 272,208 236,208 224,196
GND on Top Layer "C_P3V3_L03_P-001" (solid, remove dead copper, pour order 12): 155,133 165,123 206,123 215,132 215,197 207,205 163,205 155,197
V-USB_1 on Top Layer "C_P3V3_L03_P-001" (solid, remove dead copper, pour order 13): 888,515 893,510 959,510 963,514 963,556 953,566 899,566 888,555
5V on Top Layer "C_P3V3_L03_P-001" (solid, remove dead copper, pour order 15): 970,515 975,510 1020,510 1029,519 1029,576 1021,584 985,584 970,569
3V3 on Top Layer "C_P3V3_L03_P-001" (solid, remove dead copper, pour order 10): 1038,525 1046,517 1060,517 1064,521 1122,521 1126,525 1126,580 1109,597 1069,597 1038,566
5V on Top Layer "C_P3V3_L03_P-001" (solid, remove dead copper, pour order 5): 1199.57,469.57 1241.89,469.57 1255.67,455.79 1255.67,413.46 1297.01,413.46 1298.98,415.43 1298.98,510.91 1292.09,517.8 1207.44,517.8 1199.57,509.92
PW-Lin1_4 on Top Layer "C_P3V3_L03_P-001" (solid, remove dead copper, pour order 4): 1060.79,418.39 1066.69,412.48 1107.05,412.48 1107.05,457.76 1118.86,469.57 1162.17,469.57 1162.17,510.91 1172.01,520.75 1179.88,520.75 1184.8,525.67 1184.8,563.07 1179.88,567.99 1132.64,567.99 1130.67,566.02 1130.67,518.78 1127.72,515.83 1074.57,515.83 1060.79,502.05
GND on InternalPlane1 (split plane): 1699.9,20.1 20.1,20.1 20.1,739.9 1699.9,739.9
3V3 on InternalPlane2 (split plane): 1699.9,149.1 1388.11,149.1 1355.1,182.11 1355.1,370 1354.71,371.95 1353.6,373.6 1317.1,410.11 1317.1,513 1316.71,514.95 1315.6,516.6 1297.6,534.6 1295.95,535.71 1294,536.1 1216,536.1 1214.05,535.71 1212.4,534.6 1186.89,509.1 1057.11,509.1 1042.1,524.11 1042.1,587 1041.71,588.95 1040.6,590.6 1027.6,603.6 1025.95,604.71 1024,605.1 984,605.1 982.05,604.71 980.4,603.6 954.4,577.6 953.29,575.95 952.9,574 952.9,487 953.29,485.05 954.4,483.4 1121.43,316.36 1123.09,315.25 1125.04,314.86 1226.98,314.86 1257.46,284.38 1257.46,186.25 1212.4,141.18 1211.29,139.53 1210.9,137.57 1210.9,20.1 20.1,20.1 20.1,739.9 1699.9,739.9
5V on InternalPlane2 (split plane): 1031.9,584.89 1031.9,522 1032.29,520.05 1033.4,518.4 1051.4,500.4 1053.05,499.29 1055,498.9 1189,498.9 1190.95,499.29 1192.6,500.4 1218.11,525.9 1291.89,525.9 1306.9,510.89 1306.9,408 1307.29,406.05 1308.4,404.4 1344.9,367.89 1344.9,180 1345.29,178.05 1346.4,176.4 1382.4,140.4 1384.05,139.29 1386,138.9 1699.9,138.9 1699.9,20.1 1221.1,20.1 1221.1,135.46 1266.16,180.53 1267.27,182.18 1267.66,184.13 1267.66,286.5 1267.27,288.45 1266.16,290.1 1232.7,323.57 1231.05,324.67 1229.09,325.06 1127.15,325.06 963.1,489.11 963.1,571.89 986.11,594.9 1021.89,594.9

## Other copper
Top Layer:
  text "1" at 1345,585 h30
  text "BRDUINO" at 1104,140 h30
Bottom Layer:
  text "4" at 1441,585 h30
InternalPlane1 (plane layer: these items are gaps in the copper):
  text "2" at 1374,585 h30
InternalPlane2 (plane layer: these items are gaps in the copper):
  lines w10: 1216,0 1216,137.57 1262.56,184.13 1262.56,286.5 1229.09,319.96 1125.04,319.96 958,487 958,574 984,600 1024,600 1037,587 1037,522 1055,504 1189,504 1216,531 1247,531 1294,531 1312,513 1312,408 1350,370 1350,180 1386,144 1723,144
  text "3" at 1409,585 h30

## Silkscreen, mask and mechanical layers (free items; w line width, h text height)
Top Solder:
  text "BRDUINO" at 1104,140 h30
Mechanical 1:
  the board outline again, w3.94